# Altium PCB AquaMate.PcbDoc
Units mm, origin at the board's own origin, x right, y up, seen from the top; angles counter-clockwise.
Board outline 45.34 x 63.5 mm, 2 copper layers (Top Layer, Bottom Layer); 17 components, 12 nets, 104 pads, 19 vias.
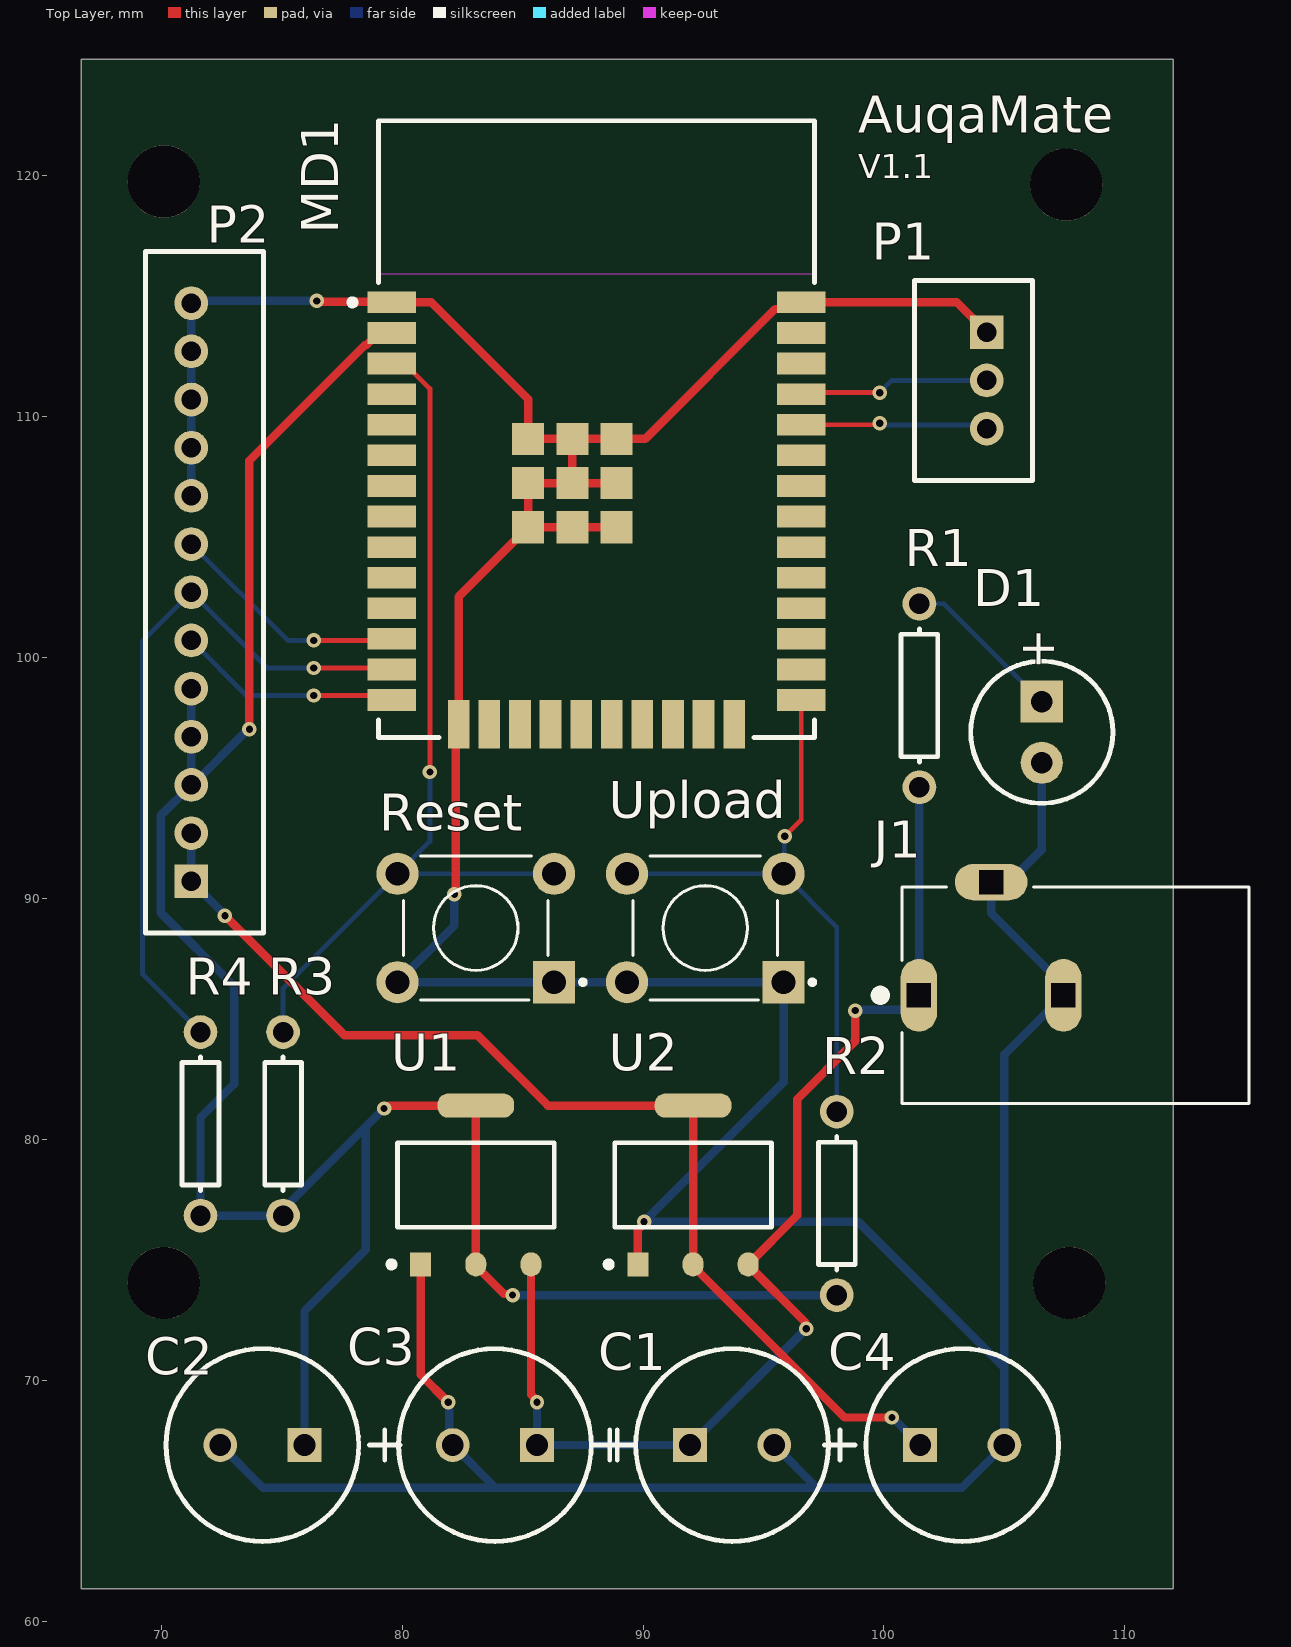
[diagram p0: Top Layer view]
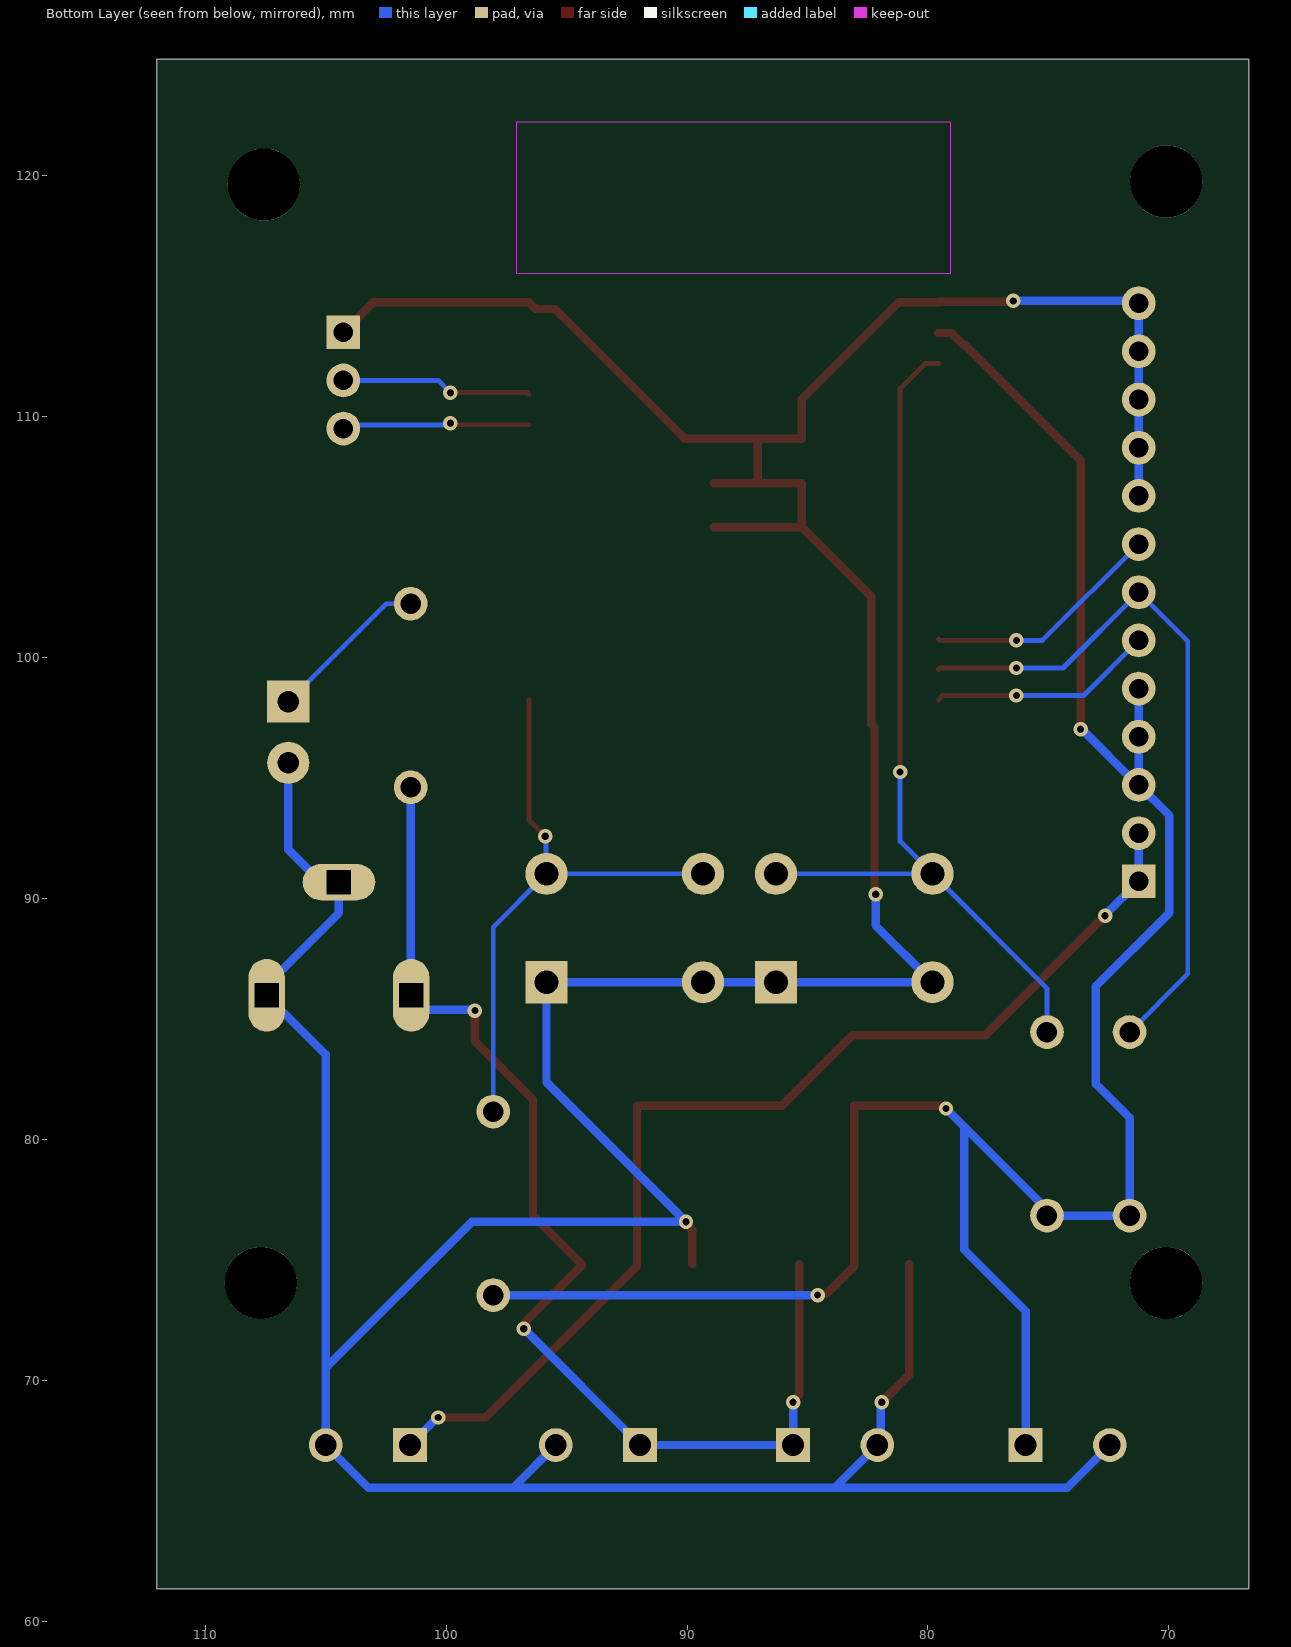
[diagram p1: Bottom Layer view, seen from below]

## Layer stack, top to bottom
Top Solder: solder mask 0.0102, Solder Resist, Dk 3.5
Top Layer: signal copper 0.0356
Dielectric 1: dielectric 0.32, FR-4, Dk 4.8
Bottom Layer: signal copper 0.0356
Bottom Solder: solder mask 0.0102, Solder Resist, Dk 3.5

## Board outline
66.675,61.341 112.014,61.341 112.014,124.841 66.675,124.841

## Design rules (kind name [scope] priority, off if disabled: settings)
BoardOutlineClearance [All] p1: gap=0.2 ignorepadtopadclearanceinfootprint=FALSE
Clearance [All] p1: gap=0.127 ignorepadtopadclearanceinfootprint=FALSE except(0.25: Arc-Hole Track-Hole SMDPad-Hole THPad-Hole Via-Hole Fill-Hole Poly-Hole Region-Hole Text-Hole)
ComponentClearance [All] p1: gap=0.127 collisioncheckmode=3 verticalgap=0.127 showdistances=TRUE
DiffPairsRouting [All] p1: maxlimit=0.254 minlimit=0.127 mostfreqgap=0.127 toplayer_minwidth=0.127 toplayer_maxwidth=25.4 toplayer_prefwidth=0.127 bottomlayer_minwidth=0.127 bottomlayer_maxwidth=25.4 bottomlayer_prefwidth=0.127 maxuncoupledlength=12.7
Height [All] p1: minheight=0 maxheight=1816.048 prefheight=12.7
HoleSize [All] p1: absolutevalues=TRUE maxlimit=6.3 minlimit=0.3 maxpercent=80.000 minpercent=20.000
HoleToHoleClearance [All] p1: gap=0.25 allowstackedmicrovias=FALSE
MinimumAnnularRing [All] p1: minimumring=0.076
MinimumSolderMaskSliver [All] p1: minsoldermaskwidth=0
PlaneClearance [All] p1: clearance=0.127
PlaneConnect PlaneConnectPowerPads [InPadClass('PowerPads')] p1: planeconnectstyle=Direct reliefexpansion=0.508 reliefentries=4 reliefconductorwidth=0.254 reliefairgap=0.254
PlaneConnect [All] p2: pad.planeconnectstyle=Relief pad.reliefexpansion=0.3 pad.reliefentries=4 pad.reliefconductorwidth=0.127 pad.reliefairgap=0.127 via.planeconnectstyle=Direct via.reliefexpansion=0.3 via.reliefentries=4 via.reliefconductorwidth=0.127 via.reliefairgap=0.127
PolygonConnect PolygonConnectPowerPads [All vs (InPadClass('PowerPads'))] p1: connectstyle=Direct reliefconductorwidth=0.254 reliefentries=4 polygonreliefangle="90 Angle" airgapwidth=0.254
PolygonConnect [All] p2: thpad.connectstyle=Relief thpad.reliefconductorwidth=0.127 thpad.reliefentries=4 thpad.polygonreliefangle="90 Angle" thpad.airgapwidth=0.127 smdpad.connectstyle=Relief smdpad.reliefconductorwidth=0.127 smdpad.reliefentries=4 smdpad.polygonreliefangle="90 Angle" smdpad.airgapwidth=0.127 via.connectstyle=Direct via.reliefconductorwidth=0.127 via.reliefentries=4 via.polygonreliefangle="90 Angle" via.airgapwidth=0.127
RoutingVias [All] p1: holewidth=0.3 width=0.6 viastyle="Through Hole" minholewidth=0.3 minwidth=0.6 maxholewidth=0.6 maxwidth=6.6
SilkToSilkClearance [All] p1: silktosilkclearance=0
SilkToSolderMaskClearance [IsPad] p1: minsilkscreentomaskgap=0.127 clearancetoexposedcopper=TRUE
SolderMaskExpansion [All] p1: expansion=0.075 istentingtop=FALSE
Width Power [InNetClass('Power')] p1: maxlimit=0.35 minlimit=0.35 preferedwidth=0.35
Width Normal [All] p2: maxlimit=25.4 minlimit=0.127 preferedwidth=0.2 minimp=50.000000 maximp=50.000000 favimp=50.000000
20 further rules are at their usual default settings.

## Classes and differential pairs
net class Power: 3V3 5V 9V GND

## Components (designator, comment, footprint, x,y, rotation, side; value= is the part's Value field where it differs from the comment)
C1 "ECA1HM101" CAPPR65-350-1150X800X1250 93.698,67.31 r0 top
C2 "ECA1HM101" CAPPR65-350-1150X800X1250 74.196,67.31 r180 top
C3 "ECA1HM101" CAPPR65-350-1150X800X1250 83.848,67.31 r180 top
C4 "ECA1HM101" CAPPR65-350-1150X800X1250 103.251,67.31 r0 top
D1 "WP7113SRD/D" KING-WP7113SRDD_V 106.553,96.901 r270 top
J1 "9V MAX" CUI_PJ-102A 107.95,85.979 r0 top
MD1 "ESP32-WROOM-32" FP-ESP32-WROOM-32-MFG 88.065,109.485 r0 top
P1 "Program" B3B-PH-K 104.267,111.506 r270 top
P2 "Connectors" B13B-PH-K 71.247,102.712 r90 top
R1 "Res1" AXIAL-0.3 101.473,98.425 r270 top value=680R
R2 "Res1" AXIAL-0.3 98.044,77.343 r270 top value=12K
R3 "Res1" AXIAL-0.3 75.057,80.645 r270 top value=12K
R4 "Res1" AXIAL-0.3 71.628,80.645 r90 top value=4.7K
Reset "1825910-6" SW_1825910-6-4 83.058,88.773 r180 top
U1 "AMS1117-3.3" FP-AMS1117-IPC_C 83.058,78.105 r90 top
U2 "AMS1117-5" FP-AMS1117-IPC_C 92.075,78.105 r90 top
Upload "1825910-6" SW_1825910-6-4 92.583,88.773 r180 top

## Footprints (in the part's own frame and the unit in brackets; to place one, negate y for a bottom-side part, rotate by r counter-clockwise, add the part's x,y. Pads: shape width x height; smd on the part's side, far side on the other; paste and mask are expansions set on the pad)
AXIAL-0.3 [mm] "Axial Device, Thru-Hole; 2 Leads; 0.3 in Pin Spacing"
  round 1.4 hole 0.85: 1(-3.81,0) 2(3.81,0)
  silkscreen extent -2.77,-0.76 2.77,0.76
B3B-PH-K [mm]
  rect 1.4x1.4 hole 0.813: 1(-2,0)
  round 1.4 hole 0.813: 2(0,0) 3(2,0)
  silkscreen extent -4.15,-3 4.15,1.9, body extent -3.95,-2.25 3.95,2.25, height 6
B13B-PH-K [mm]
  rect 1.4x1.4 hole 0.813: 1(-12,0)
  round 1.4 hole 0.813: 2(-10,0) 3(-8,0) 4(-6,0) 5(-4,0) 6(-2,0) 7(0,0) 8(2,0) 9(4,0) 10(6,0) 11(8,0) 12(10,0) 13(12,0)
  silkscreen extent -14.15,-3 14.15,1.9
CAPPR65-350-1150X800X1250 [mm] "THD, 2-Leads, Dia 8mm, Body 11.5mm"
  rect 1.4x1.4 hole 0.9: 1(-1.75,0)
  round 1.4 hole 0.9: 2(1.75,0)
  silkscreen extent -5.71,-4 4,4, body extent -4,-4 4,4, height 12.5
CUI_PJ-102A [mm]
  oval 1.508x3.016 hole 1 square: 1(-6.5,0) 2(-0.5,0)
  oval 3.016x1.508 hole 1 square: 3(-3.5,4.7)
  silkscreen extent -8.3,-4.5 7.2,4.5
FP-AMS1117-IPC_C [mm]
  rect 1.004x0.872 smd paste+0 mask+0: 1(-3.295,2.29)
  rrect100% 1.004x0.872 smd paste+0 mask+0: 2(-3.295,0) 3(-3.295,-2.29)
  rrect87% 1.004x3.182 smd paste+0 mask+0: 4(3.295,0)
  silkscreen extent -3.42,-3.25 1.75,3.62, body extent -3.9,-3.35 3.9,3.35, height 0.25
FP-ESP32-WROOM-32-MFG [mm]
  rect 2x0.9 smd paste+0 mask+0: 1(-8.5,5.26) 2(-8.5,3.99) 3(-8.5,2.72) 4(-8.5,1.45) 5(-8.5,0.18) 6(-8.5,-1.09) 7(-8.5,-2.36) 8(-8.5,-3.63) 9(-8.5,-4.9) 10(-8.5,-6.17) 11(-8.5,-7.44) 12(-8.5,-8.71) 13(-8.5,-9.98) 14(-8.5,-11.25) 25(8.5,-11.25) 26(8.5,-9.98) 27(8.5,-8.71) 28(8.5,-7.44) 29(8.5,-6.17) 30(8.5,-4.9) 31(8.5,-3.63) 32(8.5,-2.36) 33(8.5,-1.09) 34(8.5,0.18) 35(8.5,1.45) 36(8.5,2.72) 37(8.5,3.99) 38(8.5,5.26)
  rect 0.9x2 smd paste+0 mask+0: 15(-5.715,-12.25) 16(-4.445,-12.25) 17(-3.175,-12.25) 18(-1.905,-12.25) 19(-0.635,-12.25) 20(0.635,-12.25) 21(1.905,-12.25) 22(3.175,-12.25) 23(4.445,-12.25) 24(5.715,-12.25)
  rect 1.33x1.33 smd paste+0 mask+0: 39(-2.835,-4.075) 39(-2.835,-2.24) 39(-2.835,-0.405) 39(-1,-4.075) 39(-1,-2.24) 39(-1,-0.405) 39(0.835,-4.075) 39(0.835,-2.24) 39(0.835,-0.405)
  Keep-Out Layer region: -9,6.45 9,6.45 9,12.75 -9,12.75
  Keep-Out Layer region: -9,6.45 9,6.45 9,12.75 -9,12.75
  silkscreen extent -10.25,-12.8 9.05,12.8, body extent -9.6,-13.35 9.6,12.9, height 0.25
KING-WP7113SRDD_V [mm] "THD, 2-Leads, Dia 5.9mm, Body Length 8.6mm"
  rect 1.75x1.75 hole 0.889: 1(-1.27,0)
  round 1.75 hole 0.889: 2(1.27,0)
  silkscreen extent -2.95,-2.95 2.95,2.95, body extent -2.95,-2.95 2.5,2.95, height 15.5
SW_1825910-6-4 [mm]
  rect 1.75x1.75 hole 0.99: 1(-3.25,2.25)
  round 1.75 hole 0.99: 2(3.25,2.25) 3(-3.25,-2.25) 4(3.25,-2.25)
  silkscreen extent -4.54,-3 3,3

## Part data
C1 C2 C3 C4: library part CMP-1665-00042-2, "Aluminum Electrolytic Capacitor, 100 uF, +/- 20%, 50 V, -40 to 85 degC, 2-Pin THD, RoHS, Bulk", Capacitance=100uF, Case/Package=Radial, Dielectric Material=Aluminium, Leakage Current=3uA, Manufacturer=Panasonic, Max Operating Temperature=85degC, Min Operating Temperature=-40degC, Package Description="2-Pin Radial Lead, Dia 8 mm, Height 12.5 mm", Package Quantity=200, Package Reference=CAPPR65-350-1150X800X1250, Ripple Current=250mA, Tolerance=20%, Voltage=50V, Datasheet URL=https://industrial.panasonic.com/cdbs/www-data/pdf/RDF0000/ABA0000C1218.pdf, Datasheet Version="Rev. 05, 10/2016", Diameter=8mm, Dissipation Factor=0.12%, Height=11.5mm, Height - Seated (Max)=0.492inch, Lead Diameter=0.6mm, Lead Free=LeadFree, Lead Pitch=3.5mm, Lead/Base Style=Straight, Length=11.5mm, Life (Hours)=2000Hour, Manufacturer URL=http://www.panasonic.com/, Mount=ThroughHole, Number of Pins=2, Packaging=Bulk, Polarity=Polar, Radiation Hardening=No, REACH SVHC=NoSVHC, Ripple Current (AC)=250mA, RoHSCompliant=true, Termination=Radial, Voltage Rating=50V, Voltage Rating (DC)=50V
D1: library part CMP-1757-00002-1, "The Super Bright Red Source Color Device, 1.85 V, -40 to 85 degC, 2-Pin THD, RoHS, Tape and Reel", Case\Package=LQFP, Max Clock Frequency="120 MHz", Max Operating Temperature="105 degC", Max Supply Voltage="3.6 V", Min Operating Temperature="-40 degC", Min Supply Voltage="1.71 V", Package Quantity=160, ComponentLink1Description=Datasheet, ComponentLink1URL=http://www.kingbrightusa.com/images/catalog/SPEC/WP7113SRD-D.pdf, DatasheetVersion="Rev. 6A, 07/2016", Density="1 MB", Interface=UART, PackageDescription="2-Pin Through Hole Device, Dia 5.9 mm, Body Length 8.6 mm", PackageReference=WP7113SRDD, Packaging=Tray, Pins=64, RAM Size="128 KB", REACH SVHC="No SVHC", RoHSCompliant=true, Weight="0.012224 oz"
J1: library part PJ-102A, "2.0 mm Center Pin, 2.5 A, Right Angle, Through Hole, Tapered Pins, Dc Power Jack Connector", Package=None, Availability=Unavailable, MP=PJ-102A, Price=None
MD1: library part CMP-194065-000008-1, "RX TXRX MOD WIFI SURFACE MOUNT", Case/Package=SMD/SMT, Frequency=2.5GHz, Max Operating Temperature=85°C, Min Operating Temperature=-40°C, Operating Supply Voltage=3.6V, Package Quantity=550, Data Rate=150Mbps, Mount="Surface Mount", Packaging="Cut Tape", Sensitivity=-98dBm, Weight=0.088185oz
P1: library part B3B-PH-K, "Connector Header Through Hole 3 position 0.079 (2.00mm)", Package=None, Availability="No availability data", Check_prices=https://www.snapeda.com/parts/B3B-PH-K/JST/view-part/2895696/?ref=eda, MF=JST, MP=B3B-PH-K, Price=None, SnapEDA_Link=https://www.snapeda.com/parts/B3B-PH-K/JST/view-part/2895696/?ref=snap
P2: library part B13B-PH-K, "Connector Header Through Hole 13 position 0.079 (2.00mm)", Package=None, Availability="In Stock", MF=JST, MP=B13B-PH-K, Price=None, Purchase-URL=https://pricing.snapeda.com/search/part/B13B-PH-K/?ref=eda
R1 R2 R3 R4: "Resistor", LatestRevisionDate=17-Jul-2002, LatestRevisionNote="Re-released for DXP Platform.", PackageDescription="Axial Device, Thru-Hole; 2 Leads; 0.3 in Pin Spacing", PackageReference=AXIAL-0.3, Published=8-Jun-2000, Publisher="Altium Limited"
Reset Upload: "Switch Tactile OFF (ON) SPST Round Button PC Pins 0.05A 24VDC 100000Cycles 1.57N Thru-Hole Loose", Package=None, Availability=Unavailable, MP=1825910-6, Price=None
U1: library part CMP-209535-000001-1, "LDO Voltage Regulators 1A, 3.3V", Dropout Voltage=1.1V, Manufacturer="Advanced Monolithic Systems", Max Junction Temp=+125°C, Max Power Dissipation=1.2W, Max Supply Voltage=15V, Nominal Supply Current=5mA, Output Current=1A, Output Voltage=3.3V, Package=AMS1117, Temperature="-40°C to +125°C", Temperature Range Low=-40°C, Automotive=No, Category=IC, ComponentLink2Description=Datasheet, ComponentLink2URL=http://www.advanced-monolithic.com/pdf/ds1117.pdf, Device Class L1="Integrated Circuits (ICs)", Device Class L2="Power Management ICs", Device Class L3="Voltage Regulators - Linear", Height=1.8mm, Ipc Land Pattern Name=SOT229P700X180-4, Lead Free=Yes, Manufacturer Part Number=AMS1117-3.3, Number Of Outputs=1, Octopart=https://octopart.com/ams1117-3.3-advanced+monolithic+systems-25899300, Output Type=Fixed, RoHS=TRUE, Standoff Height=0.64mm, Temperature Range High=+125°C
U2: library part CMP-209535-000001-1, "LDO Voltage Regulators 1A, 5V", Dropout Voltage=1.1V, Manufacturer="Advanced Monolithic Systems", Manufacturer Part Number=AMS1117-3.3, Max Junction Temp=+125°C, Max Power Dissipation=1.2W, Max Supply Voltage=15V, Nominal Supply Current=5mA, Output Current=1A, Output Voltage=5V, Package=AMS1117, Temperature="-40°C to +125°C", Temperature Range Low=-40°C, Automotive=No, Category=IC, ComponentLink2Description=Datasheet, ComponentLink2URL=http://www.advanced-monolithic.com/pdf/ds1117.pdf, Device Class L1="Integrated Circuits (ICs)", Device Class L2="Power Management ICs", Device Class L3="Voltage Regulators - Linear", Height=1.8mm, Ipc Land Pattern Name=SOT229P700X180-4, Lead Free=Yes, Number Of Outputs=1, Octopart=https://octopart.com/ams1117-3.3-advanced+monolithic+systems-25899300, Output Type=Fixed, RoHS=TRUE, Standoff Height=0.64mm, Temperature Range High=+125°C

## Free pads (board coordinates)
  round 3 hole 3: 2(107.569,119.634) 3(70.104,119.761) 4(70.104,74.041) 5(107.696,74.041)

## Via types
v1: diameter 0.6, hole 0.3, Top Layer to Bottom Layer, 19 vias

## Nets (pads, with @x,y where several pads share a name; then routed paths per layer and width w, separated by ;. In a path a pad name is that pad's centre, name@x,y a point inside that pad or via, vN(x,y) a via of type N, cw(c..) or ccw(c..) an arc to the next point about the centre after c; other vN are vias at no path point)
3V3: C2.1 MD1.2 P2.3 P2.4 P2.5 R2.2 R3.2 R4.1 U1.2 U1.4 | length 96.7
  Top Layer w0.35: v1(73.66,97.028) 73.66,108.177 78.44,112.957 78.497,112.957 79.015,113.475 MD1.2 ; v1(79.248,81.28) 79.316,81.28 79.436,81.4 U1.4 U1.2 83.058,74.744 84.221,73.581 84.534,73.581 v1(84.582,73.533)
  Bottom Layer w0.35: P2.5 P2.4 P2.3 ; v1(73.66,97.028) 73.612,97.028 71.295,94.712 P2.3 ; C2.1 75.946,72.873 78.486,75.413 78.486,80.518 ; v1(79.248,81.28) 78.486,80.518 ; v1(84.582,73.533) R2.2 ; P2.3 69.977,93.442 69.977,89.408 73.025,86.36 73.025,82.296 71.628,80.899 R4.1 R3.2 75.057,77.089 78.486,80.518
5V: C4.1 P2.1 P2.2 U2.2 U2.4 | length 45.9
  Top Layer w0.35: v1(72.644,89.281) 77.597,84.328 83.118,84.328 86.046,81.4 U2.4 U2.2 92.075,74.744 98.366,68.453 v1(100.33,68.453)
  Bottom Layer w0.35: P2.2 P2.1 72.644,89.315 v1(72.644,89.281) ; v1(100.33,68.453) 100.358,68.453 C4.1
9V: C1.1 C3.1 J1.1 R1.2 U1.3 U2.3 | length 48.4
  Top Layer w0.35: U1.3 85.348,69.406 85.598,69.156 v1(85.598,69.088) ; U2.3@94.365,74.771 96.726,72.41 96.726,72.184 v1(96.774,72.136) ; U2.3 96.393,76.838 96.393,81.661 98.806,84.074 v1(98.806,85.344)
  Bottom Layer w0.35: v1(85.598,69.088) C3.1 C1.1 v1(96.774,72.136) ; v1(98.806,85.344) 98.834,85.372 100.915,85.372 101.461,85.918 101.461,94.603 R1.2
EN: MD1.3 R3.1 Reset.3 Reset.4 | length 37.8
  Top Layer w0.2: MD1.3 80.115,112.205 81.153,111.167 v1(81.153,95.25)
  Bottom Layer w0.2: R3.1 75.057,86.272 Reset.4 ; v1(81.153,95.25) 81.153,92.368 Reset.4 ; Reset.3 Reset.4
GND: C1.2 C2.2 C3.2 C4.2 D1.2 J1.2 J1.3 MD1.1 MD1.15 MD1.38 MD1.39 P1.1 P2.9 P2.10 P2.11 P2.12 P2.13 Reset.1 Reset.2 U1.1 U2.1 Upload.1 Upload.2 | length 205.7
  Top Layer w0.35: v1(76.454,114.808) 76.485,114.777 79.533,114.777 MD1.1 81.216,114.745 85.23,110.731 85.23,109.08 MD1.39@87.065,109.08 ; U1.1 80.768,70.235 v1(81.915,69.088) ; v1(82.169,90.17) 82.217,90.218 82.217,97.102 MD1.15 82.35,102.53 MD1.39@85.23,105.41 ; MD1.39@88.9,105.41 87.065,105.41 MD1.39@85.23,105.41 ; MD1.39@88.9,107.245 MD1.39@87.065,107.245 ; U2.1 89.785,76.255 90.043,76.513 v1(90.043,76.581) ; P1.1 103.028,114.745 MD1.38 96.29,114.47 95.48,114.47 90.09,109.08 88.9,109.08 MD1.39@87.065,109.08 ; MD1.39@85.23,105.41 85.23,107.245 MD1.39@87.065,107.245 ; MD1.39@87.065,107.245 MD1.39@87.065,109.08
  Bottom Layer w0.35: P2.9 P2.10 P2.11 P2.12 P2.13 71.343,114.808 v1(76.454,114.808) ; C2.2 74.224,65.532 83.876,65.532 ; v1(81.915,69.088) 81.963,69.04 81.963,67.445 C3.2 83.876,65.532 ; v1(82.169,90.17) 82.169,88.884 Reset.2 Reset.1 Upload.2 Upload.1 95.833,82.371 v1(90.043,76.581) 98.933,76.581 105.001,70.513 ; C1.2 97.226,65.532 ; D1.2 106.553,92.028 105.204,90.679 J1.3 104.45,89.4 106.895,86.955 106.915,86.955 J1.2@107.45,86.42 ; J1.2 105.001,83.53 105.001,70.513 ; 83.876,65.532 97.226,65.532 ; 97.226,65.532 103.223,65.532 C4.2 105.001,70.513
NetD1_1: D1.1 R1.1 | length 6.8
  Bottom Layer w0.2: R1.1 102.489,102.235 D1.1
pH: MD1.14 P2.6 | length 9.3
  Top Layer w0.2: v1(76.327,98.425) 79.375,98.425 MD1.14
  Bottom Layer w0.2: P2.6 73.534,98.425 v1(76.327,98.425)
RXD0: MD1.34 P1.3 | length 7.8
  Top Layer w0.2: MD1.34 99.759,109.665 v1(99.822,109.728)
  Bottom Layer w0.2: v1(99.822,109.728) 99.899,109.651 104.122,109.651 P1.3
Servo: MD1.12 P2.8 | length 10
  Top Layer w0.2: v1(76.327,100.711) 79.501,100.711 MD1.12
  Bottom Layer w0.2: P2.8 75.248,100.711 v1(76.327,100.711)
Temp: MD1.13 P2.7 R4.2 | length 29.7
  Top Layer w0.2: v1(76.327,99.568) 79.502,99.568 MD1.13
  Bottom Layer w0.2: R4.2 69.215,86.868 69.215,100.68 P2.7 74.391,99.568 v1(76.327,99.568)
TXD0: MD1.35 P1.2 | length 7.9
  Top Layer w0.2: MD1.35 96.628,110.998 v1(99.822,110.998)
  Bottom Layer w0.2: v1(99.822,110.998) 100.33,111.506 P1.2
UpLoad: MD1.25 R2.1 Upload.3 Upload.4 | length 24.8
  Top Layer w0.2: v1(95.885,92.583) 96.565,93.263 MD1.25
  Bottom Layer w0.2: Upload.4 Upload.3 ; v1(95.885,92.583) 95.859,92.557 95.859,91.049 Upload.3 ; R2.1 98.044,88.812 Upload.3
pads on no net: MD1.4 MD1.5 MD1.6 MD1.7 MD1.8 MD1.9 MD1.10 MD1.11 MD1.16 MD1.17 MD1.18 MD1.19 MD1.20 MD1.21 MD1.22 MD1.23 MD1.24 MD1.26 MD1.27 MD1.28 MD1.29 MD1.30 MD1.31 MD1.32 MD1.33 MD1.36 MD1.37

## Silkscreen, mask and mechanical layers (free items; w line width, h text height)
Top Overlay:
  text "AuqaMate" at 98.933,121.793 h1.52
  text "V1.1" at 98.933,119.888 h1
Mechanical 13:
  lines w0.254: 66.802,61.595 111.76,61.595 111.76,124.587 66.802,124.587 66.802,61.595

## Text inside footprints (layer, text, board x,y; h text height)
D1: Top Overlay "+" at 105.791,101.219 h1.5 r270